# EAGLE board MachineLearning-MM-Carrier (EAGLE 9.5.2)
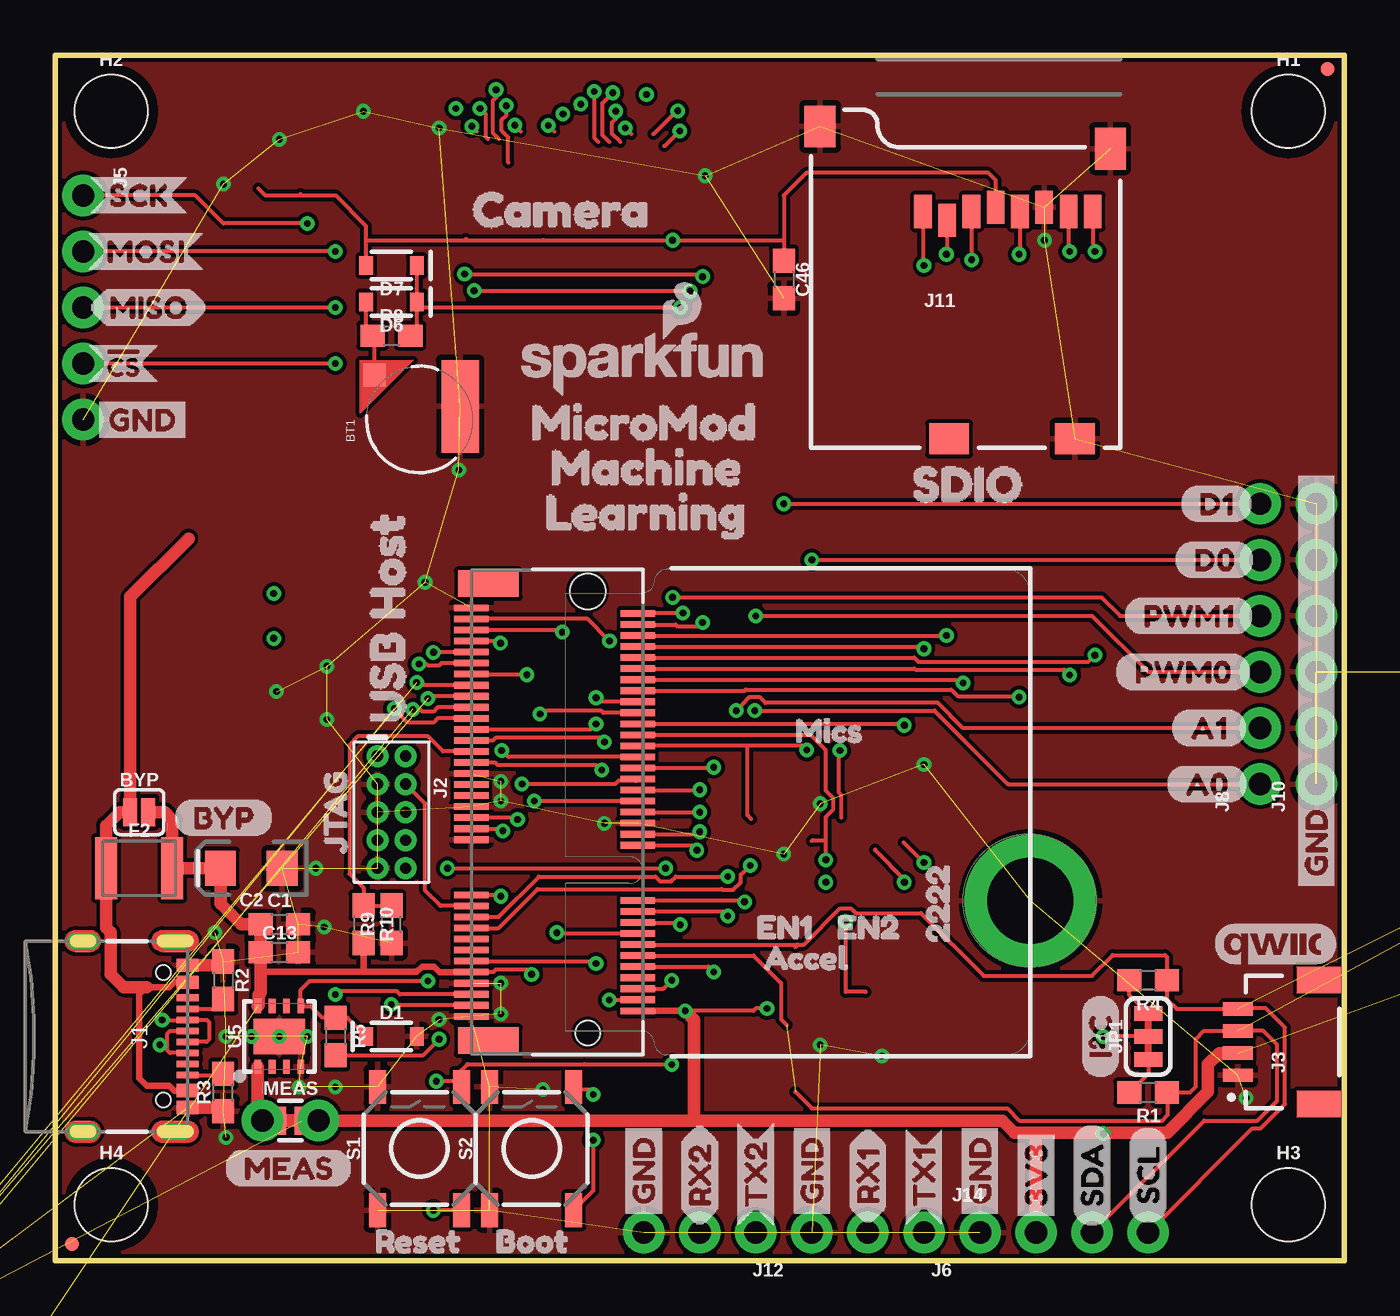
[diagram p0: board, top side]
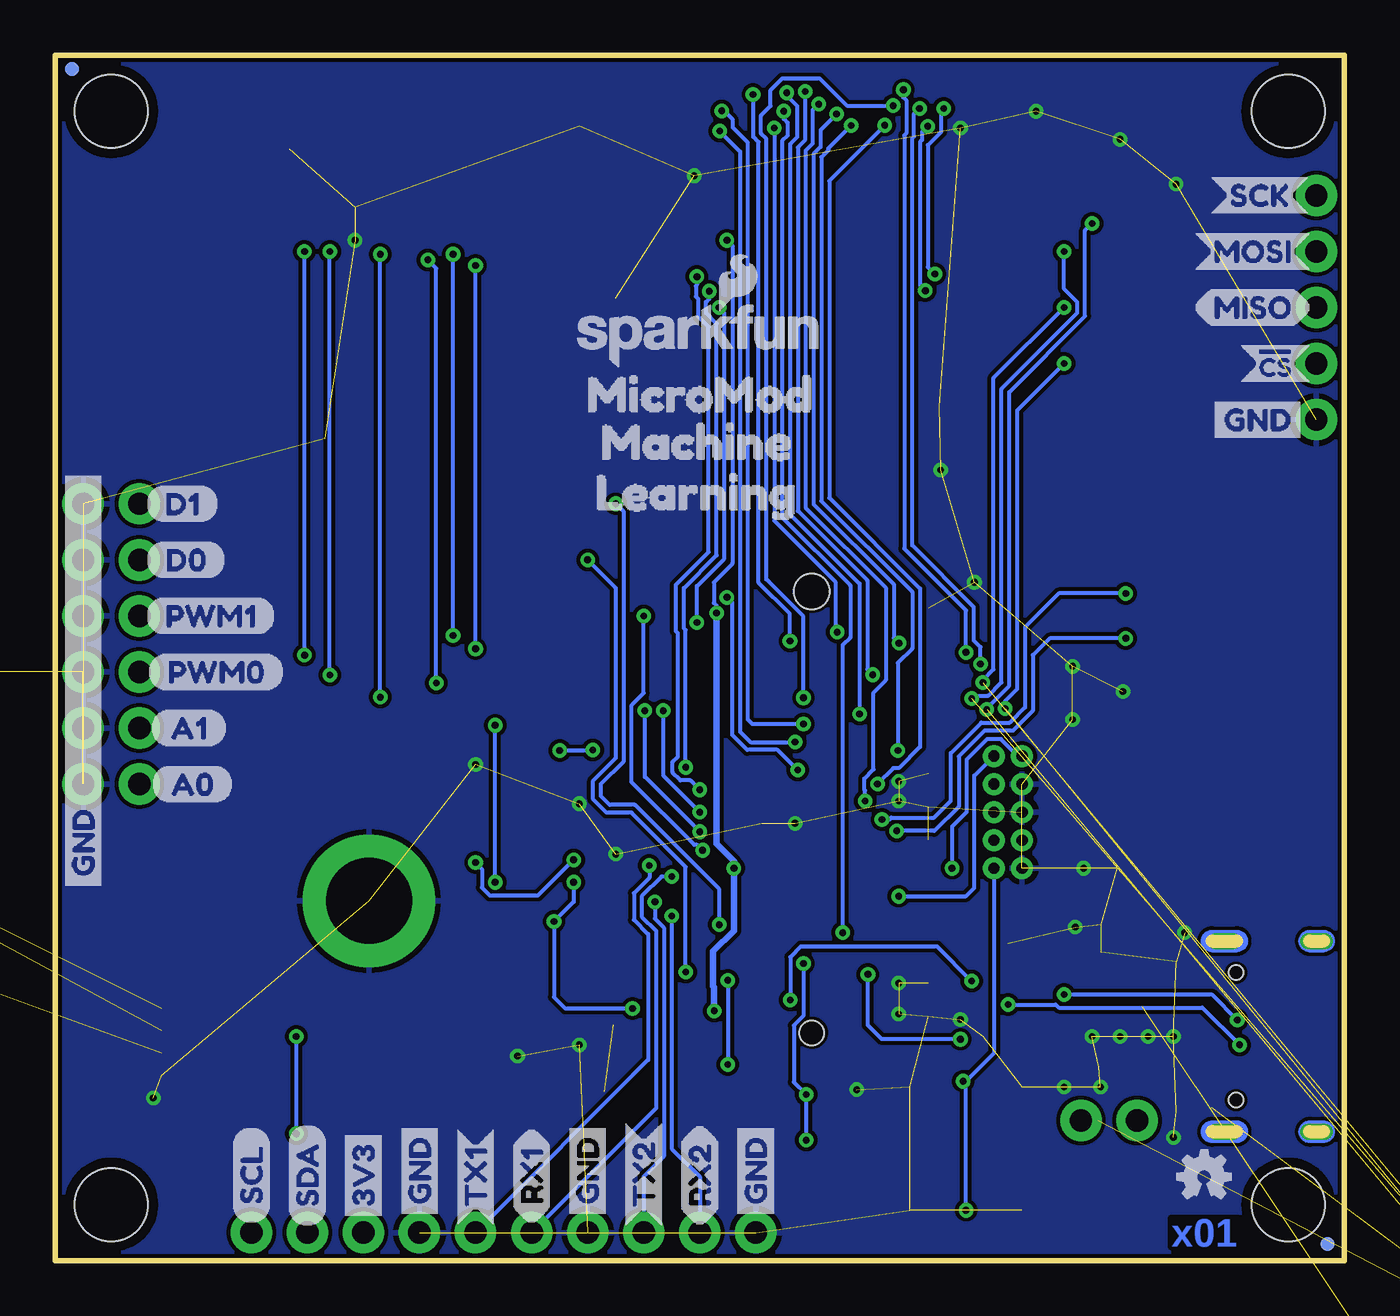
[diagram p1: board, bottom side, seen from below]

Size 58.42 x 54.61 mm. Coordinates in mm from the lower left corner, seen from the top.
Outline: 0,0 0,54.61 58.42,54.61 58.42,0 0,0
Copper layers (1*16): Top 0.035mm / dielectric 1.5mm / Bottom 0.035mm
Design rules "SparkFun-2-layer-TIGHT *": minimum track width 7mil, minimum drill 12mil, track to track 7mil, track to pad 7mil, pad to pad 7mil, via to via 7mil, smd to smd 7mil, copper to edge 7mil, drill to drill 7mil, minimum pad ring 7mil, minimum via ring 7mil, stop-mask expansion 4mil, vias tented up to drill 25mil, thermal gap 10mil
Net classes: 0 default: width 0 mm, drill 0 mm; 1 power: width 0.762 mm

## Footprints (pad centres in the part's own frame; a part is rotated, then mirrored left to right if it is on the bottom)
ML414H_IV01E = smd 1 x 1: + 2.022,2.032 | smd 4.2 x 1.7: - 0.6,-1.85
SMT-JUMPER_2_NO_SILK = smd 0.635 x 1.27: 1 -0.406,0; 2 0.406,0
0603 = smd 1.1 x 1: 1 -0.85,0; 2 0.85,0
EIA3216 = smd 1.4 x 1.6: + 1.4,0; - -1.4,0
SOD-323 = smd 0.63 x 0.83: A 1.15,0; C -1.15,0
LED-0603 = smd 1 x 1: A -0.877,0; C 0.877,0
1210 = smd 1 x 2.8: 1 -1.5,0; 2 1.5,0
FIDUCIAL-MICRO = smd 0.635 x 0.635: 1 0,0
STAND-OFF = hole 3.302: 0,0
STAND-OFF-REFLOW-M2.5 = drill 3.9 pad 6: 1 0,0
USB-C-16P-2LAYER-PADS = smd 0.3 x 1: A5 -1.25,-0.34; A6 -0.25,-0.34; A7 0.25,-0.34; A8 1.25,-0.34; B5 1.75,-0.34; B6 0.75,-0.34; B7 -0.75,-0.34; B8 -1.75,-0.34 | smd 0.6 x 1: GND -3.225,-0.34; GND2 3.225,-0.34; VBUS1 -2.45,-0.34; VBUS2 2.45,-0.34 | drill 0.4 pad 0.6 long: SHLD1 -4.318,-0.915; SHLD2 4.318,-0.915; SHLD3 -4.318,-5.095; SHLD4 4.318,-5.095 | hole 0.65: -2.89,-1.445; 2.89,-1.445
2X5-PTH-1.27MM = drill 0.508 pad 1: 1 -2.54,-0.635; 2 -2.54,0.635; 3 -1.27,-0.635; 4 -1.27,0.635; 5 0,-0.635; 6 0,0.635; 7 1.27,-0.635; 8 1.27,0.635; 9 2.54,-0.635; 10 2.54,0.635
JST04_1MM_RA = smd 0.6 x 1.35: 1 -1.5,0; 2 -0.5,0; 3 0.5,0; 4 1.5,0 | smd 1.2 x 2: NC1 2.8,-3.675; NC2 -2.8,-3.675
LATCHTERMINAL-5MM-3 = drill 1.5: 1 -5,0; 2 0,0; 3 5,0
1X05_NO_SILK = drill 1.016 pad 1.88: 1 0,0; 2 2.54,0; 3 5.08,0; 4 7.62,0; 5 10.16,0
1X03_NO_SILK = drill 1.016 pad 1.88: 1 0,0; 2 2.54,0; 3 5.08,0
RJ11-6 = drill 1.016 pad 1.88: 1 -3.175,8.89; 2 -1.905,6.35; 3 -0.635,8.89; 4 0.635,6.35; 5 1.905,8.89; 6 3.175,6.35 | hole 3.251: -5.08,0; 5.08,0
1X06_NO_SILK = drill 1.016 pad 1.88: 1 0,0; 2 2.54,0; 3 5.08,0; 4 7.62,0; 5 10.16,0; 6 12.7,0
M.2-CONNECTOR-E = smd 0.3 x 1.55: 1 9.25,-5.275; 2 9,2.275; 3 8.75,-5.275; 4 8.5,2.275; 5 8.25,-5.275; 6 8,2.275; 7 7.75,-5.275; 8 7.5,2.275; 9 7.25,-5.275; 10 7,2.275; 11 6.75,-5.275; 12 6.5,2.275; 13 6.25,-5.275; 14 6,2.275; 15 5.75,-5.275; 16 5.5,2.275; 17 5.25,-5.275; 18 5,2.275; 19 4.75,-5.275; 20 4.5,2.275; 21 4.25,-5.275; 22 4,2.275; 23 3.75,-5.275; 32 1.5,2.275; 33 1.25,-5.275; 34 1,2.275; 35 0.75,-5.275; 36 0.5,2.275; 37 0.25,-5.275; 38 0,2.275; 39 -0.25,-5.275; 40 -0.5,2.275; 41 -0.75,-5.275; 42 -1,2.275; 43 -1.25,-5.275; 44 -1.5,2.275; 45 -1.75,-5.275; 46 -2,2.275; 47 -2.25,-5.275; 48 -2.5,2.275; 49 -2.75,-5.275; 50 -3,2.275; 51 -3.25,-5.275; 52 -3.5,2.275; 53 -3.75,-5.275; 54 -4,2.275; 55 -4.25,-5.275; 56 -4.5,2.275; 57 -4.75,-5.275; 58 -5,2.275; 59 -5.25,-5.275; 60 -5.5,2.275; 61 -5.75,-5.275; 62 -6,2.275; 63 -6.25,-5.275; 64 -6.5,2.275; 65 -6.75,-5.275; 66 -7,2.275; 67 -7.25,-5.275; 68 -7.5,2.275; 69 -7.75,-5.275; 70 -8,2.275; 71 -8.25,-5.275; 72 -8.5,2.275; 73 -8.75,-5.275; 74 -9,2.275; 75 -9.25,-5.275 | smd 1.2 x 2.75: A1 10.35,-4.5; A2 -10.35,-4.5 | hole 1.1: 10,0 | hole 1.6: -10,0
MICRO-SD-SOCKET = smd 1.8 x 1.4: CD1 -2.05,0.4; CD2 -7.75,0.4 | smd 0.8 x 1.5: CS -7.84,10.3; DI -6.74,10.7; DO -2.34,10.7; GND -3.44,10.9; RSV1 -8.94,10.7; RSV2 -1.24,10.7; SCLK -4.54,10.7; VCC -5.64,10.9 | smd 1.4 x 1.9: GND1 -13.6,14.55; GND3 -0.45,13.55
1X04_NO_SILK = drill 1.016 pad 1.88: 1 0,0; 2 2.54,0; 3 5.08,0; 4 7.62,0
SMT-JUMPER_3_2-NC_TRACE_SILK = smd 0.66 x 1.27: 1 -1.041,0; 2 0,0; 3 1.041,0
SMT-JUMPER_2_NC_TRACE_SILK = smd 0.66 x 1.27: 1 -0.521,0; 2 0.521,0
SMT-JUMPER_3_1-NC_TRACE_SILK = smd 0.66 x 1.27: 1 -1.041,0; 2 0,0; 3 1.041,0
MA5532-AE = smd 1.3 x 3.2: 1 -4.65,0; 2 4.65,0
COMBO-JUMPER_2_NC_TRACE = smd 0.635 x 1.27: 1 -0.508,0; 2 0.508,0 | drill 1.016 pad 1.88: 3 -1.27,0; 4 1.27,0
TACTILE_SWITCH_SMD_5.2MM = smd 1.524 x 0.762: 1 -2.794,1.905; 2 2.794,1.905; 3 -2.794,-1.905; 4 2.794,-1.905
LGA-8-2.5X2.5 = smd 0.35 x 0.5: 1 -0.975,1.025; 2 -0.325,1.025; 3 0.325,1.025; 4 0.975,1.025; 5 0.975,-1.025; 6 0.325,-1.025; 7 -0.325,-1.025; 8 -0.975,-1.025
VEML6075_A3OP = smd 0.9 x 0.35: 1 -0.95,0.35; 2 -0.95,-0.35; 4 0.95,0.35 | smd 1 x 0.35: 3 0.9,-0.35
16LD_MLPQ = smd 0.7 x 0.35: 1 -1.919,0.968; 2 -1.919,0.318; 3 -1.919,-0.332; 4 -1.919,-0.982; 9 1.908,-0.982; 10 1.908,-0.332; 11 1.908,0.318; 12 1.908,0.968 | smd 0.35 x 0.7: 5 -0.982,-1.917; 6 -0.332,-1.917; 7 0.318,-1.917; 8 0.968,-1.917; 13 0.968,1.907; 14 0.318,1.907; 15 -0.332,1.907; 16 -0.982,1.907 | smd 2.7 x 2.7: 17 -0.007,-0.007
8-UDFN = smd 0.3 x 0.65: 1 -0.975,-1.375; 2 -0.325,-1.375; 3 0.325,-1.375; 4 0.975,-1.375; 5 0.975,1.375; 6 0.325,1.375; 7 -0.325,1.375; 8 -0.975,1.375 | smd 2.35 x 1.6: EP 0,0

## Placement (x,y rotation side)
BT1  ML414H  [ML414H_IV01E]  16.51,38.1 90 top
BYP  JUMPER-SMT_2_NO_SILK  [SMT-JUMPER_2_NO_SILK]  3.81,20.32 0 top
C1  0.1uF  [0603]  10.16,15.24 0 top
C2  10uF  [EIA3216]  8.89,17.78 180 top
C3  0.1uF  [0603]  113.03,50.8 0 top  (outside the outline)
C4  0.1uF  [0603]  113.03,46.99 0 top  (outside the outline)
C5  0.1uF  [0603]  91.44,22.86 0 top  (outside the outline)
C6  1.0uF  [0603]  -64.77,-74.93 0 top  (outside the outline)
C7  10uF  [0603]  -64.77,-78.74 0 top  (outside the outline)
C8  1nF  [0603]  -64.77,-82.55 0 top  (outside the outline)
C13  0.22uF  [0603]  10.16,13.97 0 top
C46  0.1uF  [0603]  33.02,44.45 270 top
D1  3.3V  [SOD-323]  15.24,10.16 0 top
D2  RED  [LED-0603]  91.44,26.67 0 top  (outside the outline)
D3  250mA/100V  [SOD-323]  -57.15,-33.02 0 top  (outside the outline)
D4  250mA/100V  [SOD-323]  -57.15,-36.83 0 top  (outside the outline)
D5  250mA/100V  [SOD-323]  -57.15,-55.88 0 top  (outside the outline)
D6  3A/10V/280mV  [SOD-323]  15.24,43.43 180 top
D7  1A/23V/620mV  [SOD-323]  15.24,45.09 180 top
D8  250mA/100V  [SOD-323]  -57.15,-59.69 0 top  (outside the outline)
D9  250mA/100V  [SOD-323]  -57.15,-63.5 0 top  (outside the outline)
D10  250mA/100V  [SOD-323]  -57.15,-67.31 0 top  (outside the outline)
D11  Yellow  [LED-0603]  -64.77,-101.6 0 top  (outside the outline)
F2  6V/2A  [1210]  3.81,17.78 0 top
FD1  FIDUCIALUFIDUCIAL  [FIDUCIAL-MICRO]  0.76,0.76 0 top
FD2  FIDUCIALUFIDUCIAL  [FIDUCIAL-MICRO]  57.66,53.98 0 top
FD3  FIDUCIALUFIDUCIAL  [FIDUCIAL-MICRO]  0.76,0.76 0 bottom
FD4  FIDUCIALUFIDUCIAL  [FIDUCIAL-MICRO]  57.66,53.98 0 bottom
FRAME1  FRAME-LEDGER  [CREATIVE_COMMONS]  8.89,-21.59 0 top  (outside the outline)
H1  STAND-OFF  [STAND-OFF]  55.88,52.07 0 top
H2  STAND-OFF  [STAND-OFF]  2.54,52.07 0 top
H3  STAND-OFF  [STAND-OFF]  55.88,2.54 0 top
H4  STAND-OFF  [STAND-OFF]  2.54,2.54 0 top
H5  STAND-OFF-REFLOW2.5MM_TALL  [STAND-OFF-REFLOW-M2.5]  44.2,16.3 0 top
J1  [USB-C-16P-2LAYER-PADS]  6.35,10.16 270 top
J2  JTAG  [2X5-PTH-1.27MM]  15.24,20.32 270 top
J3  QWIIC_RIGHT_ANGLE  [JST04_1MM_RA]  53.59,9.91 90 top
J4  [LATCHTERMINAL-5MM-3]  -20.32,-12.7 0 top  (outside the outline)
J5  [1X05_NO_SILK]  1.27,48.26 270 top
J6  [1X03_NO_SILK]  39.37,1.27 180 top
J7  RJ11 - RAIN  [RJ11-6]  -38.1,-13.97 0 top  (outside the outline)
J8  [1X06_NO_SILK]  54.61,21.59 90 top
J9  MICROMOD-2222-C  [M.2-CONNECTOR-E]  24.13,20.32 270 top
J10  [1X06_NO_SILK]  57.15,21.59 90 top
J11  microSD  [MICRO-SD-SOCKET]  48.26,36.83 0 top
J12  [1X03_NO_SILK]  31.75,1.27 180 top
J13  RJ11 - WIND  [RJ11-6]  -52.07,-13.97 0 top  (outside the outline)
J14  [1X04_NO_SILK]  41.91,1.27 0 top
JP1  [SMT-JUMPER_3_2-NC_TRACE_SILK]  49.53,10.16 90 top
JP2  VIN LED ENABLE  [SMT-JUMPER_2_NC_TRACE_SILK]  -68.58,-104.14 0 top  (outside the outline)
JP3  EN ADR PU  [SMT-JUMPER_3_1-NC_TRACE_SILK]  104.14,44.45 0 top  (outside the outline)
JP4  3V3 LED ENABLE  [SMT-JUMPER_2_NC_TRACE_SILK]  95.25,35.56 0 top  (outside the outline)
L1  100uH  [MA5532-AE]  -59.69,-95.25 0 top  (outside the outline)
LOGO1  SFE_LOGO_NAME_FLAME.1_INCH  [SFE_LOGO_NAME_FLAME_.1]  26.67,40.64 0 top
LOGO2  QWIIC_LOGO_CONNECTOR  [QWIIC_5.5MM]  55.31,14.35 0 top
LOGO3  OSHW-LOGOMINI  [OSHW-LOGO-MINI]  6.35,3.81 0 bottom
LOGO4  SFE_LOGO_NAME_FLAME.1_INCH  [SFE_LOGO_NAME_FLAME_.1]  29.21,41.91 0 bottom
MEAS  [COMBO-JUMPER_2_NC_TRACE]  10.67,6.35 0 top
R1  2.2k  [0603]  49.53,7.62 180 top
R2  5.1k  [0603]  7.62,12.7 270 top
R3  5.1k  [0603]  7.62,7.62 90 top
R4  2.2k  [0603]  49.53,12.7 180 top
R5  100k  [0603]  12.7,10.16 270 top
R6  10k  [0603]  -64.77,-86.36 0 top  (outside the outline)
R7  4.7k  [0603]  99.06,39.37 0 top  (outside the outline)
R8  1k  [0603]  15.24,41.91 0 top
R9  10k  [0603]  15.24,15.24 90 top
R10  20k  [0603]  13.97,15.24 270 top
R11  1k  [0603]  91.44,30.48 0 top  (outside the outline)
R12  1k  [0603]  -57.15,-25.4 0 top  (outside the outline)
R13  1k  [0603]  -57.15,-29.21 0 top  (outside the outline)
R14  1k  [0603]  -57.15,-40.64 0 top  (outside the outline)
R15  1k  [0603]  -57.15,-44.45 0 top  (outside the outline)
R16  1k  [0603]  -57.15,-48.26 0 top  (outside the outline)
R17  1k  [0603]  -57.15,-52.07 0 top  (outside the outline)
R18  4.7k  [0603]  -57.15,-71.12 0 top  (outside the outline)
R19  10k  [0603]  -64.77,-90.17 0 top  (outside the outline)
R20  1k  [0603]  -64.77,-105.41 0 top  (outside the outline)
S1  Reset  [TACTILE_SWITCH_SMD_5.2MM]  16.51,5.08 90 top
S2  BOOT  [TACTILE_SWITCH_SMD_5.2MM]  21.59,5.08 90 top
U1  BME280  [LGA-8-2.5X2.5]  113.03,57.15 0 top  (outside the outline)
U2  VEML6075  [VEML6075_A3OP]  100.33,35.56 0 top  (outside the outline)
U3  AS3935  [16LD_MLPQ]  -63.5,-68.58 0 top  (outside the outline)
U5  AP7361C-33FGE  [8-UDFN]  10.16,10.16 0 top
U$1  [ACCEL6]  31.24,13.72 0 top
U$2  [RESET3]  13.59,0.89 0 top
U$3  [CAMERA5]  17.53,47.62 0 top
U$4  [LEARNING3]  20.83,33.91 0 top
U$5  [MEAS]  7.62,4.19 0 top
U$6  [GND_P]  1.52,38.1 0 top
U$7  [MOSI_O]  1.4,45.72 0 top
U$8  [MISO_I]  1.52,43.18 0 top
U$9  [SCK_O]  1.52,48.26 0 top
U$10  [!CS_O]  1.27,40.64 0 top
U$11  [GND_P]  57.15,16.51 90 top
U$12  [D13]  50.93,34.29 0 top
U$13  [D13]  54.36,34.29 0 bottom
U$14  [D02]  50.67,31.75 0 top
U$15  [PWM10]  48.39,29.21 0 top
U$16  [D02]  54.36,31.75 0 bottom
U$17  [RX25]  29.21,1.52 90 top
U$18  [JTAG_TO]  12.7,17.53 90 top
U$19  [BOOT2]  19.05,0.89 0 top
U$20  [USB_HOST0]  15.05,22.99 90 top
U$21  [SDIO1]  37.47,35.18 0 top
U$22  [MACHINE2]  21.08,35.94 0 top
U$23  [GND_P]  26.67,1.65 90 bottom
U$24  [MICROMOD0]  20.19,37.97 0 top
U$25  [RX10]  36.83,1.65 90 bottom
U$26  [MICS0]  32.64,24 0 top
U$27  [BYP]  5.33,20.07 0 top
U$28  [TX24]  31.75,1.52 90 bottom
U$29  [RX10]  36.83,1.65 90 top
U$30  [RX25]  29.21,1.52 90 bottom
U$31  [TX13]  39.37,1.52 90 top
U$32  [GND_P]  34.29,1.65 90 top
U$33  [GND_P]  26.67,1.65 90 top
U$34  [EN13]  30.86,15.11 0 top
U$35  [EN24]  34.54,15.11 0 top
U$36  [GND_P]  41.91,1.65 90 top
U$37  [I2C]  47.37,8.26 90 top
U$38  [3V3_P]  44.45,1.52 90 top
U$39  [SDA_IO]  46.99,1.52 90 top
U$40  [SCL_IO]  49.53,1.65 90 top
U$41  [TX13]  39.37,1.52 90 bottom
U$42  [GND_P]  34.29,1.65 90 bottom
U$43  [A00]  50.29,21.59 0 top
U$44  [A00]  54.1,21.59 0 bottom
U$45  [GND_P]  41.91,1.65 90 bottom
U$46  [3V3_P]  44.45,1.52 90 bottom
U$47  [SDA_IO]  46.99,1.52 90 bottom
U$48  [SCL_IO]  49.53,1.65 90 bottom
U$49  [SCK_O]  6.1,48.26 0 bottom
U$50  [MOSI_O]  6.86,45.72 0 bottom
U$51  [MISO_I]  6.86,43.18 0 bottom
U$52  [!CS_O]  4.95,40.64 0 bottom
U$53  [GND_P]  6.35,38.1 0 bottom
U$54  [GND_P]  57.15,16.51 90 bottom
U$55  [22229]  40,13.5 90 top
U$56  [TX24]  31.75,1.52 90 top
U$57  [A10]  50.55,24.13 0 top
U$58  [A10]  54.1,24.13 0 bottom
U$59  [PWM01]  48.01,26.67 0 top
U$60  [PWM01]  54.23,26.67 0 bottom
U$61  [PWM10]  54.36,29.21 0 bottom
U$64  [MICROMOD0]  35.69,39.24 0 bottom
U$65  [MACHINE2]  35.05,37.08 0 bottom
U$66  [LEARNING3]  35.31,34.8 0 bottom

## Library data of the parts
BT1 = SparkFun-Batteries; PROD_ID: BATT-14267
BYP JP1-JP4 MEAS = SparkFun-Jumpers
C1 C5 C46 = SparkFun-Capacitors; PROD_ID: CAP-00810
C2 = SparkFun-Capacitors; PROD_ID: CAP-00811
C3 C4 = SparkFun-Capacitors; PROD_ID: CAP-08390
C6 = SparkFun-Capacitors; PROD_ID: CAP-00868
C7 = SparkFun-Capacitors; PROD_ID: CAP-11015
C8 = SparkFun-Capacitors; PROD_ID: CAP-07886
C13 = SparkFun-Capacitors; PROD_ID: CAP-07822
D1 = SparkFun-DiscreteSemi; PROD_ID: DIO-11284
D2 = SparkFun-LED; PROD_ID: DIO-00819
D3-D5 D8-D10 = SparkFun-DiscreteSemi; PROD_ID: DIO-09646
D6 = SparkFun-DiscreteSemi; PROD_ID: DIO-14072
D7 = SparkFun-DiscreteSemi; PROD_ID: DIO-11623
D11 = SparkFun-LED; PROD_ID: DIO-09003
F2 = SparkFun-Fuses; PROD_ID: RES-14313
FD1-FD4 FRAME1 LOGO1-LOGO4 = SparkFun-Aesthetics
H1-H4 = SparkFun-Hardware
H5 = SparkFun-Hardware; PROD_ID: HW-14899
J1 = SparkFun-Connectors; PROD_ID: CONN-14122
J2 J4-J6 J8 J10 J12 J14 = SparkFun-Connectors
J3 = SparkFun-Connectors; PROD_ID: CONN-13694
J7 J13 = SparkFun-Connectors; PROD_ID: CONN-08590; SF_ID: PRT-00132
J9 = Teensy; PROD_ID: CONN-14877
J11 = SparkFun-Connectors; PROD_ID: CONN-07820
L1 = SparkFun-Coils; PROD_ID: NDUC-11334
R1 R4 = SparkFun-Resistors; PROD_ID: RES-08272
R2 R3 = SparkFun-Resistors; PROD_ID: RES-12083
R5 = SparkFun-Resistors; PROD_ID: RES-07828
R6 R9 R19 = SparkFun-Resistors; PROD_ID: RES-00824
R7 R18 = SparkFun-Resistors; PROD_ID: RES-07857
R8 R11-R17 R20 = SparkFun-Resistors; PROD_ID: RES-07856
R10 = SparkFun-Resistors; PROD_ID: RES-09383
S1 S2 = SparkFun-Switches; PROD_ID: SWCH-14139
U1 = SparkFun-Sensors; PROD_ID: IC-13090
U2 = SparkFun-Sensors; PROD_ID: IC-14149
U3 = SparkFun-Sensors; PROD_ID: IC-11333
U5 = ublox; PROD_ID: VREG-14094
U$1 U$3 U$4 U$22 U$24 U$64-U$66 = buzzard_labels (11)
U$2 U$55 = buzzard_labels (9)
U$5-U$11 U$18 U$23 U$27 U$32 U$33 U$36-U$40 U$42 U$45-U$54 = SparkFun-Buzzard
U$12-U$14 U$16 U$17 U$26 U$28 U$30 U$43 U$44 U$56 = buzzard_labels (12)
U$15 U$19-U$21 U$61 = buzzard_labels (10)
U$25 U$29 U$31 U$41 = buzzard_labels (6)
U$34 U$35 = buzzard_labels (7)
U$57-U$60 = buzzard_labels (1)

## Nets
3.3V: C3.1 C4.1 C5.1 C6.1 C46.1 D7.A J2.1 J3.2 J4.1 J9.2 J9.74 J11.VCC J14.2 JP1.2 JP4.2 MEAS.2 MEAS.4 R7.2 R19.2 U1.2 U1.6 U1.8 U2.4 U3.5 U3.6
3.3V_EN: D1.C J9.4 R5.1 U5.5
5V: D3.C D9.C D10.C R18.2
!BOOT!: J9.11 S2.3 S2.4
!RESET!: J2.10 J9.6 S1.3 S1.4
A0: J8.1 J9.34
A1: J8.2 J9.38
BME_ADR: JP3.2 U1.5
CAMERA_D0: J9.40
CAMERA_D1: J9.42
CAMERA_D2: J9.44
CAMERA_D3: J9.46
CAMERA_D4: J9.48
CAMERA_D5: J9.73
CAMERA_D6: J9.71
CAMERA_D7: J9.69
CAMERA_HSYNC: J9.63
CAMERA_I2C_SCL: J9.53
CAMERA_I2C_SDA: J9.51
CAMERA_INT: J9.16
CAMERA_MCLK: J9.58
CAMERA_PCLK: J9.56
CAMERA_TRIG: J9.67
CAMERA_VSYNC: J9.65
D0: J8.5 J9.10
D1: J8.6 J9.18
GND: BT1.- C1.2 C2.- C3.2 C4.2 C5.2 C6.2 C7.2 C8.2 C13.2 C46.2 D1.A D2.C D4.A D5.A D8.A D11.C H5.1 J1.GND J1.GND2 J2.3 J2.5 J2.9 J3.1 J4.2 J5.5 J6.3 J9.1 J9.7 J9.33 J9.36 J9.39 J9.45 J9.75 J10.1 J10.2 J10.3 J10.4 J10.5 J10.6 J11.CD1 J11.GND J11.GND1 J11.GND3 J12.3 J14.1 JP3.1 L1.2 R2.1 R3.1 R6.1 R9.1 R12.1 R14.2 R15.2 S1.1 S1.2 S2.1 S2.2 U1.1 U1.7 U2.1 U3.2 U3.4 U3.7 U3.9 U3.17 U5.4 U5.EP
I2C_SCL: J3.4 J9.14 J14.4 R4.1 U1.4 U2.3
I2C_SDA: J3.3 J9.12 J14.3 R1.1 U1.3 U2.2
I2S_SCK/PDM_CLK: J9.50
I2S_SD: J9.54
I2S_WS/PDM_DAT: J9.52
INP: C8.1 L1.1 R6.2 U3.3
LIGHTNING_INT: U3.10
N$1: MEAS.1 MEAS.3 U5.1
N$2: JP1.3 R4.2
N$3: JP1.1 R1.2
N$4: JP4.1 R11.2
N$5: JP2.1 R20.2
N$6: D2.A R11.1
N$7: J7.4 R12.2
N$8: JP3.3 R7.1
N$9: J7.3 R13.2
N$10: J1.A5 R2.2
N$11: J1.B5 R3.2
N$12: J13.5 R14.1
N$13: J13.4 R15.1
N$14: BT1.+ D6.A R8.1
N$15: C7.1 U3.1
N$16: D11.A R20.1
N$17: J13.3 R16.1
N$18: J13.2 R17.1
PWM0: J8.3 J9.32
PWM1: J8.4 J9.47
RAIN: D3.A D4.C R13.1
RAIN2: J7.2
RAIN5: J7.5
RTC_3V: D6.C D7.C J9.72 R8.2
RX1: J6.2 J9.19
RX2: J9.20 J12.2
SD_CLK: J9.60 J11.SCLK
SD_CMD: J9.62 J11.DI
SD_DAT0: J9.64 J11.DO
SD_DAT1: J9.66 J11.RSV2
SD_DAT2: J9.68 J11.RSV1
SD_DAT3: J9.70 J11.CS
SOIL_MOIST_SIG: J4.3
SPI_!CS!: J5.4 J9.55 R19.1 U3.8
SPI_CLK: J5.1 J9.57 U3.11
SPI_MISO: J5.3 J9.61 U3.12
SPI_MOSI: J5.2 J9.59 U3.13
SWDCK: J2.4 J9.21
SWDIO: J2.2 J9.23
TX1: J6.1 J9.17
TX2: J9.22 J12.1
USB_D+: J1.A6 J1.B6 J9.3
USB_D-: J1.A7 J1.B7 J9.5
USBHOST_D+: J9.35
USBHOST_D-: J9.37
V_USB: BYP.1 F2.1 J1.VBUS1 J1.VBUS2
VIN: BYP.2 C1.1 C2.+ C13.1 F2.2 J9.9 JP2.2 R5.2 R10.2 U5.8
VIN/3: J9.49 R9.2 R10.1
WDIR: D5.C D9.A R17.2 R18.1
WSPEED: D8.C D10.A R16.2

## Tracks (layer width: path | path; a pad name or v marks a point on that pad's centre or on a via)
3.3V  (via drill 0.3)  (14 unrouted)
  Top 0.178: v28.45,29.34 28.43,29.32 J9.74 | 14.09,46.23 18.67,46.23 | 18.67,46.23 22.1,46.23 | 22.1,46.23 v27.98,46.23 33.02,46.23 | D7.A 14.09,46.23 | 14.09,46.23 14.09,46.87 12.7,48.26 11.05,48.26 | 9.21,48.58 9.53,48.26 11.05,48.26 | 11.11,48.32 11.05,48.26 | 18.61,46.29 18.67,46.23 | 22.11,46.24 22.1,46.23 | J11.VCC 42.62,48.95 42.29,49.28 34.04,49.28 33.02,48.26 33.02,46.23 | 33.02,46.23 C46.1 | 36.73,12.18 35.81,12.18 v35.81,15.37 | JP1.2 v47.5,10.16 | v47.5,5.75 47.5,5.8 | v32.26,11.43 31.75,11.43 31.64,11.32 v28.56,11.32 | v17.78,17.78 v27.66,17.78 | MEAS.2 MEAS.4 | 13.96,6.46 13.84,6.35
  Top 0.305: J9.2 v28.56,11.32
  Top 0.559: 44.45,5.8 43.46,5.8 42.92,6.35 28.96,6.35 | 44.45,5.8 47.5,5.8 50.39,5.8 52.23,7.65 52.23,8.89 52.75,9.41 J3.2 | MEAS.4 13.84,6.35 28.96,6.35 | v28.56,11.32 28.96,10.92 28.96,6.35 | J14.2 44.45,5.8
  Bottom 0.178: v27.98,46.23 27.74,45.99 27.74,31.57 28.57,30.73 28.57,29.8 28.45,29.68 v28.45,29.34 | v47.5,10.16 v47.5,5.75 | v34.92,17.14 34.92,16.26 v35.81,15.37 35.81,11.94 35.31,11.43 v32.26,11.43 | J2.1 14.79,22.86 15.56,23.63 16.19,23.63 17.12,22.7 17.12,20.32 17.78,19.66 v17.78,17.78
  Bottom 0.305: v28.56,11.32 28.56,12.38 28.6,12.43 28.6,14.01 27.66,14.95 v27.66,17.78 27.66,18.1 28.45,18.89 v28.45,29.34
3.3V_EN  (via drill 0.3)
  Top 0.178: v25.11,11.81 v25.12,11.82 J9.4 | v16.89,12.67 v16.89,12.66 11.54,12.66 11.53,12.65 11.51,12.65 11.13,12.28 U5.5 11.58,11.54 12.1,11.01 R5.1 13.24,11.01 D1.C
  Bottom 0.178: v16.89,12.67 18.45,14.22 24.64,14.22 25.11,13.75 v25.11,11.81
5V  (3 unrouted)
!BOOT!  (via drill 0.3)
  Top 0.178: S2.4 23.5,7.75 24.17,7.75 v24.38,7.53 | S2.3 24.38,3.17 v24.38,5.46 | J9.11 24.4,13.57 v24.51,13.46
  Bottom 0.178: v24.38,5.46 v24.38,7.53 24.95,8.09 24.95,10.66 24.51,11.09 v24.51,13.46
!RESET!  (via drill 0.3)
  Top 0.178: J9.6 27.56,12.32 v27.94,12.7 | v17.27,8.13 18.16,8.13 S1.4 18.41,8.63 18.69,8.9 23.99,8.9 24,8.89 v27.94,8.89 | S1.3 v17.14,2.29
  Bottom 0.178: J2.10 15.88,9.4 17.14,8.13 v17.27,8.13 17.14,8 v17.14,2.29 | v27.94,12.7 v27.94,8.89
A0  (via drill 0.3)
  Top 0.178: J9.34 29.1,19.32 v29.21,19.43 | v31.7,24.92 39.85,24.92 43.18,21.59 J8.1
  Bottom 0.178: v29.21,19.43 31.7,21.92 v31.7,24.92
A1  (via drill 0.3)
  Top 0.178: J9.38 v29.21,20.32 | J8.2 41.14,24.13 40,25.27 32.19,25.27 31.95,25.51 31.45,25.51 31.1,25.16 v30.86,24.92
  Bottom 0.178: v29.21,20.32 30.86,21.97 v30.86,24.92
BME_ADR  (1 unrouted)
CAMERA_D0  (via drill 0.3)
  Top 0.178: 23.61,52.19 v23.82,52.39 | v21.72,20.83 J9.40
  Bottom 0.178: v23.82,52.39 24.09,52.12 24.09,50.6 24.41,50.28 24.41,34.12 20.78,30.49 20.78,26.3 21.34,25.74 21.34,22.25 21.75,21.84 21.75,21.34 21.72,21.31 v21.72,20.83
CAMERA_D1  (via drill 0.3)
  Top 0.178: J9.42 29.19,21.32 v29.21,21.34 | 18.11,52.15 v18.16,52.2 | v18.55,44.69 29.22,44.69 v29.34,44.58
  Bottom 0.178: v29.21,21.34 29.63,21.75 30.09,21.75 30.44,22.11 30.44,22.6 30.2,22.84 30.2,28.43 30.29,28.52 30.29,30.61 28.8,32.1 28.8,42.3 29.29,42.78 29.29,43.58 29.38,43.67 29.38,44.16 29.34,44.21 v29.34,44.58 | v18.16,52.2 18.28,52.08 18.28,51.13 18.87,50.53 18.87,45.01 v18.55,44.69
CAMERA_D2  (via drill 0.3)
  Top 0.178: 21.11,51.15 v20.83,51.44 | J9.44 26.32,21.74 25.52,21.74 25.37,21.59 v21.15,21.59
  Bottom 0.178: v20.83,51.44 23.34,48.92 23.34,34.56 19.23,30.45 19.23,23.27 20.19,22.31 20.44,22.31 v21.15,21.6 v21.15,21.59
CAMERA_D3  (via drill 0.3)
  Top 0.178: J9.46 29.81,22.32 v29.84,22.35 | 19.11,51.16 v18.88,51.39 | v18.99,43.94 28.76,43.94 v28.78,43.92
  Bottom 0.178: v29.84,22.35 29.84,28.58 29.93,28.67 29.93,30.47 28.45,31.95 28.45,42.45 28.93,42.93 28.93,43.43 28.78,43.58 v28.78,43.92 | v18.88,51.39 19.14,51.13 19.14,50.77 19.23,50.68 19.23,44.18 v18.99,43.94
CAMERA_D4  (via drill 0.3)
  Top 0.178: 22.61,51.16 v22.34,51.43 | J9.48 20.52,22.82 v20.23,23.11
  Bottom 0.178: v22.34,51.43 23.38,50.39 23.38,50.3 23.7,49.99 23.7,34.41 19.58,30.3 19.58,27.73 20.23,27.08 v20.23,23.11
CAMERA_D5  (via drill 0.3)
  Top 0.178: 26.61,52.65 v26.8,52.83 | v25.12,28.07 24.12,29.07 J9.73
  Bottom 0.178: v25.12,28.07 25.12,29.3 26.54,30.72 26.54,50.67 26.78,50.91 26.78,52.82 v26.8,52.83
CAMERA_D6  (via drill 0.3)
  Top 0.178: 26.11,51.03 v25.83,51.31 | v22.99,28.47 22.89,28.57 J9.71
  Bottom 0.178: v22.99,28.47 23.06,28.55 23.06,30.76 25.83,33.53 v25.83,51.31
CAMERA_D7  (via drill 0.3)
  Top 0.178: 23.11,51.85 v23.01,51.94 | v20.18,27.97 20.08,28.07 J9.69
  Bottom 0.178: v23.01,51.94 23.74,51.22 23.74,50.45 24.05,50.13 24.05,34.27 20.42,30.64 20.42,28.21 v20.18,27.97
CAMERA_HSYNC  (via drill 0.3)
  Top 0.178: 24.61,50.68 24.45,50.84 24.45,52.95 v24.43,52.96 | J9.63 21.35,26.57 v21.37,26.54
  Bottom 0.178: v24.43,52.96 24.45,52.95 24.45,50.75 24.77,50.43 24.77,33.97 21.61,30.82 21.61,26.78 v21.37,26.54
CAMERA_I2C_SCL  (via drill 0.3)
  Top 0.178: v28.21,52.09 28.17,52.09 27.11,51.03 | J9.53 23.68,24.07 23.69,24.07 24.27,24.07 v24.51,24.31
  Bottom 0.178: v24.51,24.31 26.82,24.31 27.03,24.51 27.03,50.65 27.71,51.33 27.71,51.68 28.12,52.09 v28.21,52.09
CAMERA_I2C_SDA  (via drill 0.3)
  Top 0.178: 27.61,50.49 v28.3,51.18 | J9.51 19.84,23.57 19.98,23.71 24.68,23.71 v24.89,23.5
  Bottom 0.178: v28.3,51.18 28.3,51.17 27.38,50.25 27.38,23.96 26.92,23.5 v24.89,23.5
CAMERA_INT  (via drill 0.3)
  Top 0.178: v25.4,52.07 25.4,51.72 25.23,51.55 25.23,51.06 25.61,50.69 | J9.16 22.77,14.82 v22.73,14.86
  Bottom 0.178: v25.4,52.07 25.4,51.72 25.23,51.55 25.23,50.97 25.48,50.72 25.48,33.68 22.39,30.59 22.39,28.23 22.73,27.88 v22.73,14.86
CAMERA_MCLK  (via drill 0.3)
  Top 0.178: v20.45,52.32 20.45,51.9 20.23,51.68 20.23,51.19 20.53,50.89 20.53,49.75 | J9.58 24.69,25.32 v24.51,25.5
  Bottom 0.178: v24.51,25.5 24.51,29.19 26.19,30.87 26.19,50.82 26.43,51.06 26.43,51.88 26,52.32 26,53.03 25.47,53.56 23.78,53.56 22.55,52.32 v20.45,52.32
CAMERA_PCLK  (via drill 0.3)
  Top 0.178: 25.11,50.68 24.8,50.99 24.8,52.44 v25.27,52.91 | J9.56 24.84,24.82 24.76,24.91 22.11,24.91 v21.97,24.77
  Bottom 0.178: v25.27,52.91 25.27,52.79 24.8,52.32 24.8,50.89 25.12,50.58 25.12,33.83 21.97,30.68 v21.97,24.77
CAMERA_TRIG  (via drill 0.3)
  Top 0.178: J9.67 17.16,27.57 v17.14,27.56 | v19.98,53.04 19.98,52.7 19.85,52.57 19.85,51.07 20.11,50.81
  Bottom 0.178: v17.14,27.56 17.14,29.46 19.94,32.26 19.94,50.98 19.85,51.07 19.85,52.57 19.98,52.7 v19.98,53.04
CAMERA_VSYNC  (via drill 0.3)
  Top 0.178: J9.65 17.5,27.07 17.39,26.96 16.9,26.96 16.83,27.03 v16.49,27.03 | v19.25,52.2 19.49,51.96 19.49,50.92 19.61,50.8
  Bottom 0.178: v16.49,27.03 16.49,27.79 16.79,28.09 16.79,29.61 19.58,32.41 19.58,50.83 19.49,50.92 19.49,51.96 v19.25,52.2
D0  (via drill 0.3)
  Top 0.178: J9.10 29.61,13.32 v29.84,13.08 | v34.29,31.75 J8.5
  Bottom 0.178: v29.84,13.08 29.84,17.84 32.3,20.3 33.44,20.3 34.04,20.9 34.04,21.74 33.01,22.78 33.01,30.47 v34.29,31.75
D1  (via drill 0.3)
  Top 0.178: J9.18 28.22,15.32 v28.32,15.22 | v33.02,34.29 J8.6
  Bottom 0.178: v28.32,15.22 28.32,16.82 32.15,20.65 33.3,20.65 33.69,21.04 33.69,21.6 32.65,22.63 32.65,33.92 v33.02,34.29
GND  (via drill 0.3)  (99 unrouted)
  Top 0.559: J1.GND 7.46,13.38 R2.1 | J1.GND2 7.46,6.93 R3.1
  other vias: 12.7,7.87 10.16,10.16 8.89,10.16 11.43,10.16 7.75,10.16 7.24,14.86 12.19,15.11 11.81,17.78 7.75,5.59 11.05,7.87 17.4,10.92 20.19,12.57 24.89,19.81 20.19,21.72 20.19,20.83 16.76,30.73 10.03,25.78 12.32,26.92 12.32,24.51 18.29,35.81 17.4,51.31 29.46,49.15 10.16,50.8 13.97,52.07 7.62,48.77 44.83,46.23 39.37,22.48 33.02,18.41 34.67,20.7 34.67,9.78 37.47,9.27 53.98,7.37 22.1,7.75 20.19,11.18
  pour Bottom (isolate 0.178): 0,54.61 58.42,54.61 58.42,0 0,0
  pour Top (isolate 0.178): 0,54.61 58.42,54.61 58.42,0 0,0
I2C_SCL  (2 unrouted)
  Top 0.178: J9.14 33.66,14.32 | 33.66,14.32 33.92,14.32 35.57,15.96 36.06,15.96 36.28,15.75 39.24,15.75 42.08,12.9 46.98,12.9 47.92,13.84 50.29,13.84 50.38,13.76 R4.1 50.38,11.85 50.82,11.41 J3.4 53.62,11.43 54.86,11.43 55.73,10.57 55.73,7.09 54.63,5.99 54.25,5.99 J14.4 | 33.54,14.21 33.66,14.32
I2C_SDA  (3 unrouted)
  Top 0.178: 33.54,7.65 34.29,6.9 43.14,6.9 43.69,6.35 50.16,6.35 50.42,6.6 50.42,7.58 R1.1 51.44,7.62 51.69,7.87 51.69,10.03 52.06,10.41 J3.3 54.74,10.41 55.37,9.78 55.37,7.24 54.48,6.35 52.07,6.35 J14.3 | 33.15,10.68 32.89,10.93 32.89,12.57 31.65,13.82 J9.12
I2S_SCK/PDM_CLK  (via drill 0.3)
  Top 0.178: 31.37,23.32 33.88,23.32 v34.06,23.14 | 31.37,23.32 J9.50 | v35.56,23.11 35.52,23.08 35.52,21.2 35.62,21.1 35.62,20.08 | 31.54,20.02 31.37,20.19 31.37,23.32
  Bottom 0.178: v35.56,23.11 34.08,23.11 v34.06,23.14
I2S_SD  (via drill 0.3)
  Top 0.178: J9.54 38.42,24.32 v38.48,24.26 | 37.16,18.62 37.16,18.59 38.48,17.27 v38.48,17.14
  Bottom 0.178: v38.48,17.14 v38.48,24.26
I2S_WS/PDM_DAT  (via drill 0.3)
  Top 0.178: J9.52 34.22,23.82 34.92,23.11 34.92,21.29 35.27,20.95 35.27,20.45 34.92,20.11 34.92,19.05 | v34.92,18.16 34.92,19.05 | 38.45,18.96 v39.37,18.03 | 34.29,19.02 34.32,19.05 34.92,19.05
  Bottom 0.178: v39.37,18.03 39.08,17.74 39.08,16.9 38.73,16.55 36.54,16.55 v34.92,18.16
INP  (3 unrouted)
N$1
  Top 0.178: MEAS.1 MEAS.3
  Top 0.559: U5.1 9.19,6.56 MEAS.3
N$2
  Top 0.178: JP1.3 48.68,12.03 R4.2
N$3
  Top 0.178: JP1.1 49.53,8.47 R1.2
N$4  (1 unrouted)
N$5  (1 unrouted)
N$6  (1 unrouted)
N$7  (1 unrouted)
N$8  (1 unrouted)
N$9  (1 unrouted)
N$10
  Top 0.178: J1.A5 7.18,11.41 R2.2
N$11
  Top 0.178: J1.B5 7.56,8.41 R3.2
N$12  (1 unrouted)
N$13  (1 unrouted)
N$14
  Top 0.178: BT1.+ 14.48,41.82 R8.1 14.09,42.21 D6.A
N$15  (1 unrouted)
N$16  (1 unrouted)
N$17  (1 unrouted)
N$18  (1 unrouted)
PWM0  (via drill 0.3)
  Top 0.178: J9.32 28.86,18.82 v29.08,18.59 | v31.75,29.21 46.99,29.21 49.53,26.67 J8.3
  Bottom 0.178: v29.08,18.59 29.32,18.83 29.46,18.83 32.3,21.67 32.3,25.16 31.75,25.71 v31.75,29.21
PWM1  (via drill 0.3)
  Top 0.178: J9.47 19.93,22.57 20.04,22.46 24.52,22.46 v24.77,22.22 | v27.98,30.05 47.42,30.05 48.26,29.21 J8.4
  Bottom 0.178: v24.77,22.22 25.68,23.14 27.07,23.14 27.74,23.81 27.74,29.81 v27.98,30.05
RAIN  (2 unrouted)
RTC_3V  (via drill 0.3)
  Top 0.178: D7.C D6.C | D6.C 16.39,43.31 16.52,43.18 v28.33,43.18 | D6.C 16.39,42.21 R8.2 | J9.72 28.12,28.82 28.2,28.74 29.16,28.74 v29.34,28.92
  Bottom 0.178: v29.34,28.92 29.34,30.56 28.09,31.81 28.09,42.94 v28.33,43.18
RX1  (via drill 0.3)
  Top 0.178: J9.19 20.1,15.57 21.93,17.4 27.2,17.4 27.41,17.18 27.91,17.18 28.12,17.4 v30.48,17.4
  Bottom 0.178: v30.48,17.4 30.94,17.4 31.84,16.5 31.84,15.59 31.19,14.94 31.19,6.91 J6.2
RX2  (via drill 0.3)
  Top 0.178: J9.20 30.28,15.82 v30.48,15.62
  Bottom 0.178: v30.48,15.62 30.48,5.08 29.21,3.81 J12.2
SD_CLK  (via drill 0.3)
  Top 0.178: v43.69,25.53 43.64,25.58 40.9,25.58 40.61,25.87 31.3,25.87 31.25,25.82 J9.60 | J11.SCLK 43.72,45.62 v43.69,45.59
  Bottom 0.178: v43.69,25.53 v43.69,45.59
SD_CMD  (via drill 0.3)
  Top 0.178: J9.62 41,26.32 v41.15,26.17 | J11.DI v41.53,45.34
  Bottom 0.178: v41.15,26.17 41.15,44.96 v41.53,45.34
SD_DAT0  (via drill 0.3)
  Top 0.178: J9.64 38.93,26.82 38.98,26.77 45.73,26.77 v45.97,26.53 | J11.DO 45.92,45.77 v45.97,45.72
  Bottom 0.178: v45.97,26.53 v45.97,45.72
SD_DAT1  (via drill 0.3)
  Top 0.178: v47.12,27.43 46.81,27.13 39.12,27.13 38.93,27.32 J9.66 | J11.RSV2 47.02,45.82 v47.12,45.72
  Bottom 0.178: v47.12,27.43 v47.12,45.72
SD_DAT2  (via drill 0.3)
  Top 0.178: J9.68 39.27,27.82 v39.37,27.72 | J11.RSV1 39.32,45.13 v39.37,45.09
  Bottom 0.178: v39.37,27.72 v39.37,45.09
SD_DAT3  (via drill 0.3)
  Top 0.178: J9.70 v40.38,28.32 v40.39,28.32 | J11.CS 40.42,45.63 v40.39,45.59
  Bottom 0.178: v40.39,28.32 v40.39,45.59
SPI_!CS!  (via drill 0.3)  (2 unrouted)
  Top 0.178: J9.55 17.34,24.57 17.14,24.37 15.96,24.37 15.61,24.72 15.61,24.77 v15.37,25.01 | v12.7,40.64 J5.4
  Bottom 0.178: v15.37,25.01 15.37,25.36 14.82,25.9 14.82,38.52 v12.7,40.64
SPI_CLK  (via drill 0.3)  (1 unrouted)
  Top 0.178: J9.57 17.33,25.07 17.14,24.88 16.64,24.88 16.55,24.97 v16.21,24.97 | v11.43,46.99 7.62,46.99 6.35,48.26 J5.1
  Bottom 0.178: v16.21,24.97 16.21,25.02 15.18,26.05 15.18,39.35 11.75,42.78 11.75,46.67 v11.43,46.99
SPI_MISO  (via drill 0.3)  (1 unrouted)
  Top 0.178: J9.61 16.5,26.07 v16.38,26.19 | v12.7,43.18 J5.3
  Bottom 0.178: v16.38,26.19 16.38,26.29 15.89,26.78 15.89,39.99 v12.7,43.18
SPI_MOSI  (via drill 0.3)  (1 unrouted)
  Top 0.178: J9.59 16.99,25.57 v16.89,25.47 | v12.7,45.72 J5.2
  Bottom 0.178: v16.89,25.47 16.77,25.59 16.14,25.59 15.54,26.19 15.54,39.5 12.1,42.93 12.1,43.43 12.7,44.02 v12.7,45.72
SWDCK
  Top 0.178: J9.21 17.46,16.07 16.76,16.76 16.76,20.7 J2.4
SWDIO  (via drill 0.3)
  Top 0.178: J9.23 20.13,16.57 v20.19,16.51
  Bottom 0.178: v20.19,16.51 17.14,16.51 16.76,16.89 16.76,21.97 J2.2
TX1  (via drill 0.3)
  Top 0.178: v31.5,17.91 31.08,17.49 31.08,17.15 30.73,16.8 30.23,16.8 30.21,16.83 21.86,16.83 20.1,15.07 J9.17
  Bottom 0.178: v31.5,17.91 31.5,17.35 32.19,16.65 32.19,15.44 31.55,14.79 31.55,9.09 J6.1
TX2  (via drill 0.3)
  Top 0.178: J9.22 31.18,16.32 v31.24,16.26
  Bottom 0.178: J12.1 31.75,3.81 31.37,4.19 31.24,4.32 30.84,4.72 30.84,15.09 31.24,15.49 v31.24,16.26
USB_D+  (via drill 0.3)
  Top 0.178: J1.B6 5.2,9.41 5.08,9.53 5.08,9.78 | 5.08,9.78 5.08,10.29 5.2,10.41 J1.A6 | J9.3 15.27,11.57 v15.24,11.6 | v4.75,9.78 5.08,9.78
  Bottom 0.178: v15.24,11.6 13.08,11.6 12.95,11.47 6.44,11.47 v4.75,9.78
USB_D-  (via drill 0.3)
  Top 0.178: J1.B7 6.1,10.91 | 6.1,10.91 6.87,10.91 6.99,10.79 6.99,10.03 6.86,9.91 J1.A7 | v4.85,10.9 6.09,10.9 6.1,10.91 | J9.5 15.61,12.07 15.49,12.2 12.83,12.2 v12.7,12.06
  Bottom 0.178: v12.7,12.06 6.01,12.06 v4.85,10.9
USBHOST_D+  (via drill 0.3)
  Top 0.178: 9.92,28.21 v9.91,28.19 | J9.35 20.19,19.57 v20.29,19.47
  Bottom 0.178: v9.91,28.19 13.35,28.19 14.11,27.43 14.11,24.92 15.02,24.02 16.3,24.02 17.48,22.85 17.48,20.57 18.58,19.47 v20.29,19.47
USBHOST_D-  (via drill 0.3)
  Top 0.178: 9.92,30.21 v9.91,30.23 | v20.95,19.99 20.88,20.07 J9.37
  Bottom 0.178: v9.91,30.23 12.95,30.23 14.47,28.7 14.47,25.07 15.16,24.37 16.45,24.37 17.83,22.99 17.83,20.83 18.59,20.07 20.53,20.07 20.61,19.99 v20.95,19.99
V_USB
  Top 0.305: J1.VBUS1 5.39,12.61 5.18,12.39 4.14,12.39 3.81,12.06 3.81,8.26 4.14,7.92 5.18,7.92 5.39,7.71 J1.VBUS2
  Top 0.559: 4.14,12.39 3.1,12.39 2.51,12.98 2.51,14.88 2.31,15.08 F2.1 2.31,19.71 2.92,20.32 BYP.1 3.4,30.07 6.04,32.71
VIN  (via drill 0.3)  (1 unrouted)
  Top 0.178: J9.9 19.85,13.07 19.95,13.17 21.39,13.17 v21.59,12.97 | R5.2 16.68,9.31 v17.4,10.03
  Top 0.305: 9.32,13.07 9.31,13.08 9.31,13.09 13.97,13.09 | J9.9 17.42,13.07 17.16,13.33 16.62,13.33 16.38,13.09 13.97,13.09 | R10.2 13.97,13.09
  Top 0.559: BYP.2 4.95,20.32 5.31,19.96 F2.2 C2.+ 7.49,16.17 8.42,15.24 C1.1 C13.1 9.31,13.08 9.31,12.13 9.23,12.05 9.23,11.58 U5.8
  Bottom 0.178: 17.4,10.08 v17.4,10.03 20.95,10.03 21.59,10.67 v21.59,12.97
VIN/3
  Top 0.178: R9.2 R10.1 13.97,16.89 13.34,17.53 13.34,23.37 13.72,23.75 16.89,23.75 17.57,23.07 J9.49
WDIR  (3 unrouted)
WSPEED  (2 unrouted)

## Text on the board
Bottom: x01